# Altium PCB msr50.PcbDoc (part 8 of 8)
Units mil, origin at the board's own origin, x right, y up, seen from the top; angles counter-clockwise.
Board outline 3925 x 3925 mil, 2 copper layers (TopLayer, BottomLayer); 109 components, 122 nets, 846 pads, 52 vias.
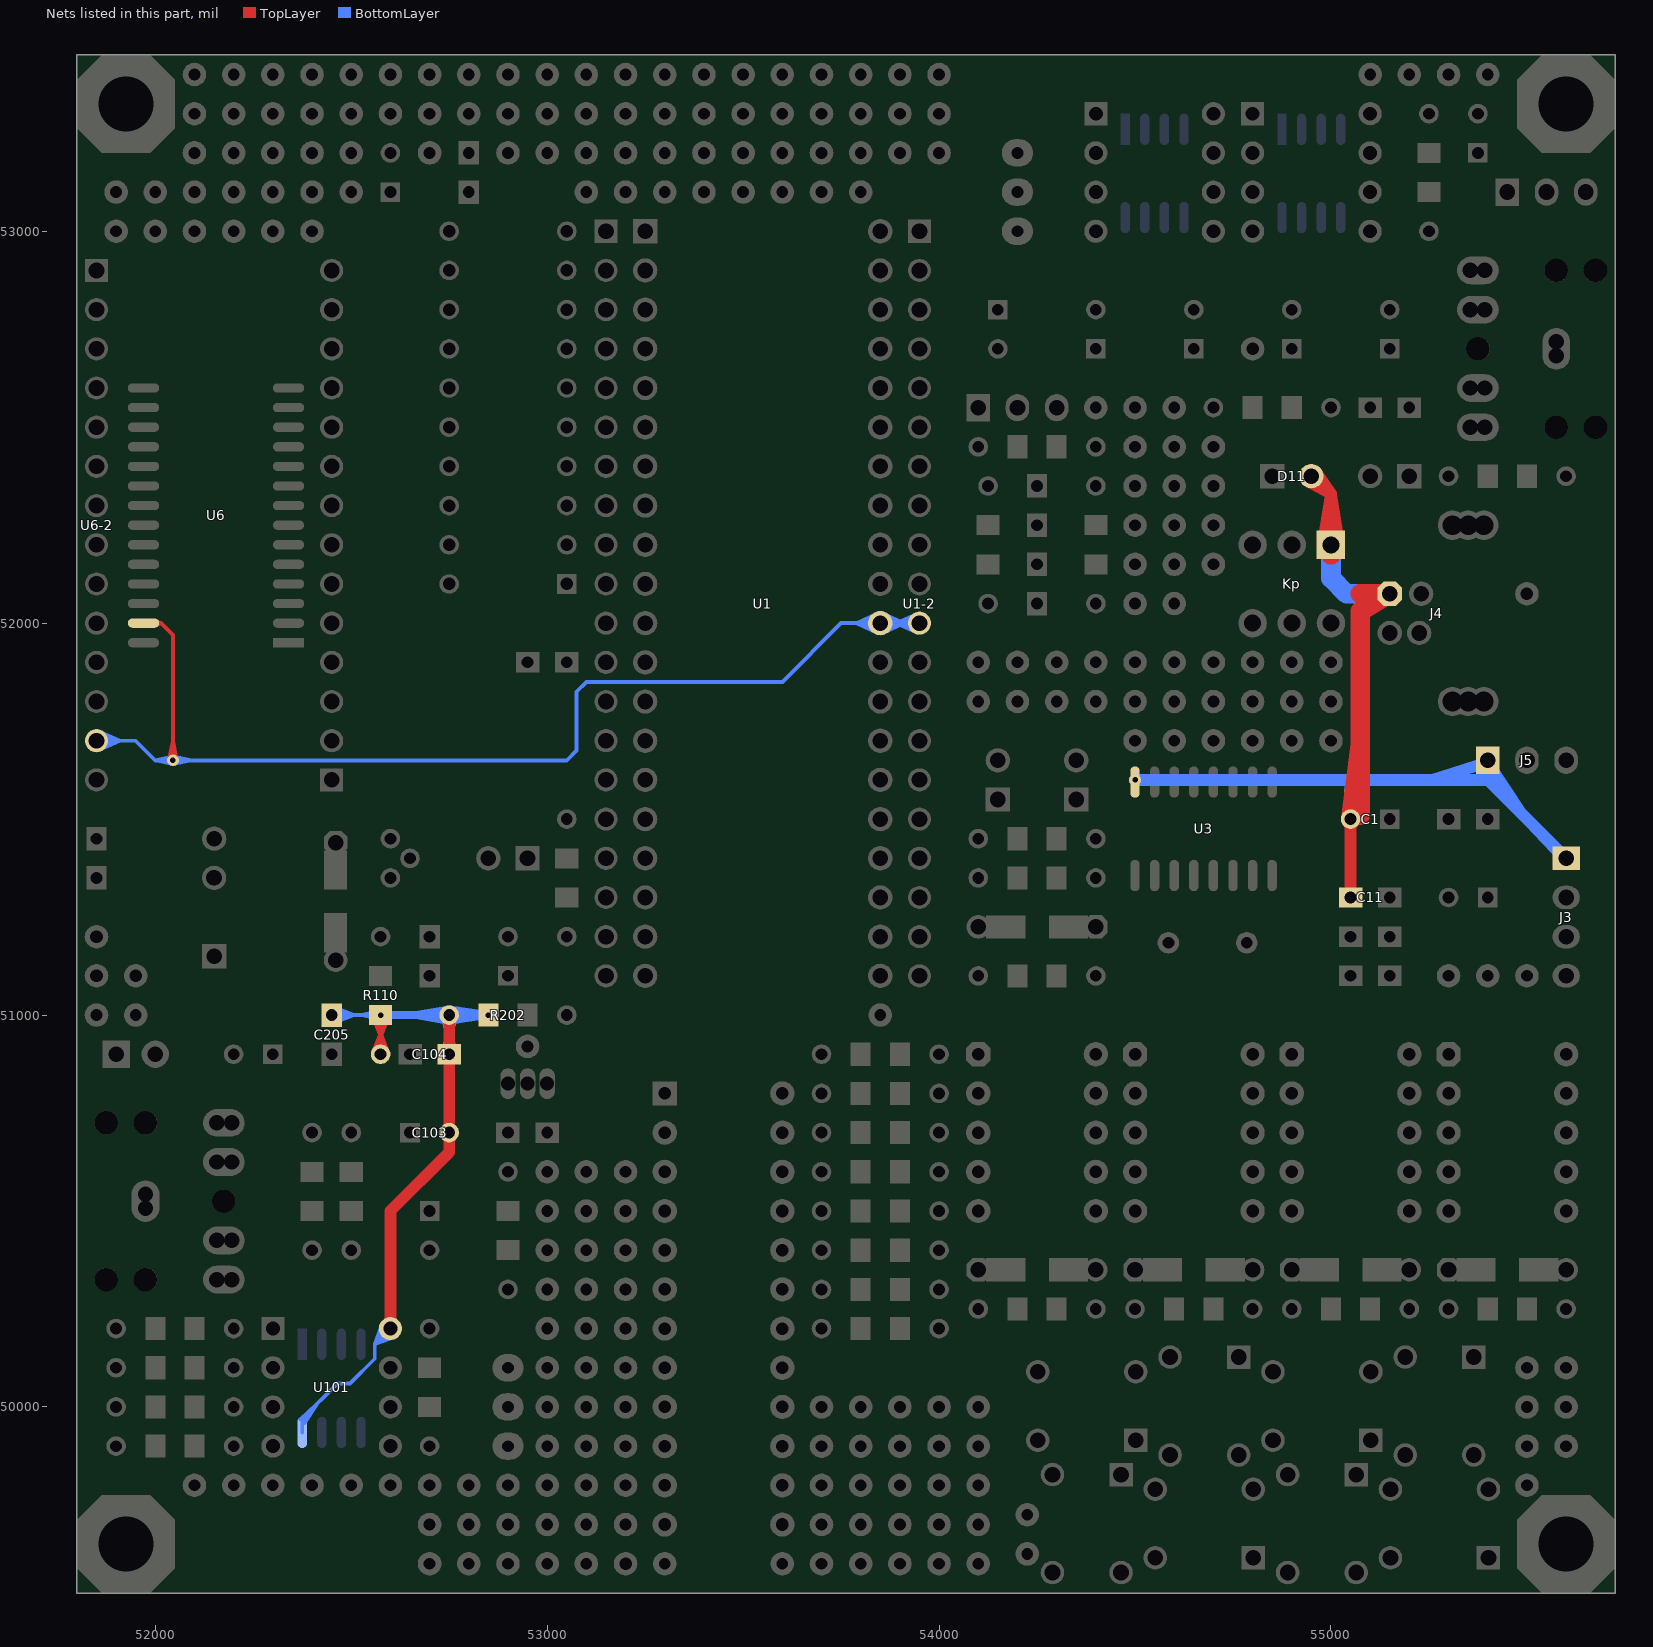
[diagram p8: the nets of this part, all layers, seen from the top]

## Via types
v1: diameter 30, hole 14, TopLayer to BottomLayer, 40 vias
v2: diameter 50, hole 28, TopLayer to BottomLayer, 12 vias

## Nets (pads, with @x,y where several pads share a name; then routed paths per layer and width w, separated by ;. In a path a pad name is that pad's centre, name@x,y a point inside that pad or via, vN(x,y) a via of type N, cw(c..) or ccw(c..) an arc to the next point about the centre after c; other vN are vias at no path point) (continued)
VCC1: C103.2 C104.1 C205.1 R110.1 R110.3 R202.1 R202.3 U101.8 U101.18 | length 5435.2
  TopLayer w10: R110.3@52554.77,50996.19 52575,50944.41 ; R110.1@52555.33,50903.64 52575,50955 ; R110.3@52564.46,50998.99 52575,50944.41 ; R110.1@52565.04,50900.91 52575,50955 ; R110.3@52565.07,50998.84 52575.9,50949.06 ; R110.3@52565.05,50998.98 52575,50951 R110.3@52584.95,50998.98 ; R110.3@52565.03,50999.19 52574.1,50949.06 ; R110.1@52575,50900 v1(52575,51000) ; R110.1@52584.96,50900.91 52575,50955 ; R110.3@52584.93,50998.84 52574.1,50949.06 ; R110.3@52584.97,50999.19 52575.9,50949.06 ; R110.3@52585.54,50998.99 52575,50944.41 ; R110.1@52594.67,50903.64 52575,50955 ; R110.3@52595.23,50996.19 52575,50944.41 ; 52574.1,50949.06 v1(52575,51000) ; v1(52575,51000) 52575.9,50949.06
  TopLayer w30: U101.8@52600,50200 52600,50319.53 ; U101.8@52600,50225 52600,50500 52750,50650 C103.2@52750,50700 C104.1@52750,50900 ; C104.1@52750,50900 R202.1@52750,51000 C104.1@52750,50900
  BottomLayer w10: U101.18@52369.93,49967.82 52411.71,50006.71 ; U101.18@52375,49935 52375,49970 52465,50060 52497.03,50060 52560,50122.97 52560,50160 ; U101.18@52375,49963 52411.71,50006.71 ; U101.18@52380.63,49958.84 52411.71,50006.71 ; C205.1@52450,51000 v1(52575,51000) ; C205.1@52451.08,50989.05 52506,51000 ; C205.1@52451.08,51010.95 52506,51000 ; C205.1@52453.94,50979.37 52506,51000 ; C205.1@52453.94,51020.63 52506,51000 ; v1@52573.98,50990.05 52526,51000 v1@52573.98,51009.95 ; U101.8@52579.31,50213.17 52560,50160 ; U101.8@52588.49,50208.87 52560,50160 ; U101.8@52608.87,50188.49 52560,50160 ; U101.8@52613.17,50179.31 52560,50160 ; C104.1@52729.37,50903.94 52750,50956 ; R202.1@52730.33,50996.36 52750,50945 ; C104.1@52739.05,50901.08 52750,50956 ; R202.1@52740.04,50999.09 52750,50945 ; C104.1@52750,50900 R202.1@52750,51000 ; R202.1@52759.96,50999.09 52750,50945 ; C104.1@52760.95,50901.08 52750,50956 ; R202.1@52769.67,50996.36 52750,50945 ; C104.1@52770.63,50903.94 52750,50956 ; 52560,50160 U101.8@52600,50200 52560,50160 ; R202.1@52750,51000 v1(52850,51000) R202.1@52750,51000 ; 52801,51000 52848.98,51009.95 52801,51000 ; 52801,51000 52848.98,50990.05 52801,51000 ; 52805,51000 52750.91,50990.04 52805,51000 ; 52805,51000 52750.91,51009.96 52805,51000 ; 52805,51000 52753.64,50980.33 52805,51000 ; 52805,51000 52753.64,51019.67 52805,51000
  BottomLayer w20: v1(52575,51000) v1(52850,51000) ; R202.1@52748.68,50985.06 52665,51000 R202.1@52748.68,51014.94 ; R202.1@52751.32,50985.06 52835,51000 R202.1@52751.32,51014.94 ; R202.1@52771.08,50988.59 v1(52850,51000) ; R202.1@52771.08,51011.41 v1(52850,51000)
VCCU: C1.2 C11.1 D11.1 J3.1 J4.1 J5.1 Kp.1 U3.16 | length 4187.4
  TopLayer w30: D11.1@54940.79,52361.92 55000,52330 ; D11.1@54950,52375 55000,52330 ; D11.1@54950,52380 55000,52330 ; D11.1@54962.04,52385.54 55000,52330 ; Kp.1@54978.66,52201.81 55000,52326.42 Kp.1@55021.34,52201.81 ; Kp.1@55000,52200 55000,52330 ; C11.1@55050,51300 C1.2@55050,51500
  TopLayer w50: Kp.1@55000,52175 Kp.1@55000,52200 ; C1.2@55050,51500 55075,51688.15 ; 55075,51510 55075,52030 ; 55075,52030 J4.1@55150,52075 ; 55075,52030 55120,52075 J4.1@55150,52075 ; J4.1@55150,52075 55075,52075 J4.1@55150,52075
  BottomLayer w30: v1(54500,51600) 55100,51600 55400,51600 ; C1.2@55050,51500 55050,51600 ; 55255.92,51600 J5.1@55400,51645 ; J5.1@55400,51650 55400,51600 ; 55486.1,51513.9 J5.1@55400,51645 ; 55506.36,51493.64 J3.1@55595,51400 ; J3.1@55600,51400 55400,51600 ; 55400,51600 J5.1@55400,51645 ; 55400,51600 J5.1@55400,51645 ; 55400,51600 J5.1@55400,51645
  BottomLayer w50: Kp.1@55000,52200 55000,52115 55040,52075 ; 55040,52075 J4.1@55150,52075 55040,52075
W\R\: U1-2.11 U1.30 U6-2.13 U6.27 | length 4305.9
  TopLayer w10: U6.27@51969.92,52000 52015,52000 ; U6.27@51998.11,52000 52015,52000 ; U6.27@51999.48,51993.33 52015,52000 ; U6.27@51999.48,52006.67 52015,52000 ; v1@52035.05,51651.02 52045,51699 v1@52054.95,51651.02 ; v1(52045,51650) 52045,51970 52015,52000
  BottomLayer w10: U6-2.13@51850,51700 51950,51700 52000,51650 ; U6-2.13@51851.77,51685.58 51909.53,51700 ; U6-2.13@51851.77,51714.42 51909.53,51700 ; U6-2.13@51855.05,51676 51909.53,51700 ; U6-2.13@51855.05,51724 51909.53,51700 ; v1@52043.89,51640.06 52000,51650 ; v1@52043.89,51659.94 52000,51650 ; v1@52046.02,51640.05 52094,51650 v1@52046.02,51659.95 ; U1.30@53844.46,51974.6 53789,52000 ; U1.30@53844.46,52025.4 53789,52000 ; U1.30@53847.9,51984.14 53789,52000 ; U1.30@53847.9,52015.86 53789,52000 ; U1.30@53849.7,51994.01 53789,52000 ; U1.30@53849.7,52005.99 53789,52000 ; U1.30@53850.3,51994.01 53911,52000 ; U1.30@53850.3,52005.99 53911,52000 ; U1.30@53852.1,51984.14 53911,52000 ; U1.30@53852.1,52015.86 53911,52000 ; U1.30@53855.54,51974.6 53911,52000 ; U1.30@53855.54,52025.4 53911,52000 ; U1-2.11@53944.95,51976 53890.47,52000 ; U1-2.11@53944.95,52024 53890.47,52000 ; U1-2.11@53948.23,51985.58 53890.47,52000 ; U1-2.11@53948.23,52014.42 53890.47,52000 ; U1-2.11@53950,52000 U1.30@53850,52000 53750,52000 53600,51850 53100,51850 53075,51825 53075,51675 53050,51650 52000,51650
pads on no net: J4.5 J4.6 J100.0 J200.0 Kp.3 Kp.4 Kp.5 Kp.6 U2.17 U3.9 U3.10 U3.11 U3.12 U3.13 U3.14 U3.15

## Polygon pours and split planes (outlines as drawn)
VCC on TopLayer "VCC" (solid, pour order 1000): 53300,51050 53800,51050 53800,53050 53300,53050

## Keep-outs
KeepOutLayer:
  the board outline again, w2

## Other copper
TopLayer:
  text "msr5" at 55560,50160 h30
  text "oooooooooo" at 52150.08,49675 h30
  text "1234567890" at 52150.08,49600 h30
  text "oooooooooo" at 52150.08,49550 h30

## Silkscreen, mask and mechanical layers (free items; w line width, h text height)
TopOverlay:
  lines w5: 51900,51550 52300,51550 ; 51900,52950 52400,52950
  text "USB-P" at 54720,52470 h30
  text "SCM-P" at 55240,52300 h30
  text "s-txd" at 54070,51730 h30
  text "u-txd" at 54320,51730 h30
  text "5V 3.3V GND" at 55350,51720 h30
  text "msr5" at 55560,50160 h30
  text "2017-04-10" at 52150,49735 h30